# Altium PCB prac_1.PcbDoc
Units mil, origin at the board's own origin, x right, y up, seen from the top; angles counter-clockwise.
Board outline 3900 x 3900 mil, 2 copper layers (Top Layer, Bottom Layer), stack 61.756 mil thick; 83 components, 60 nets, 292 pads, 60 vias.
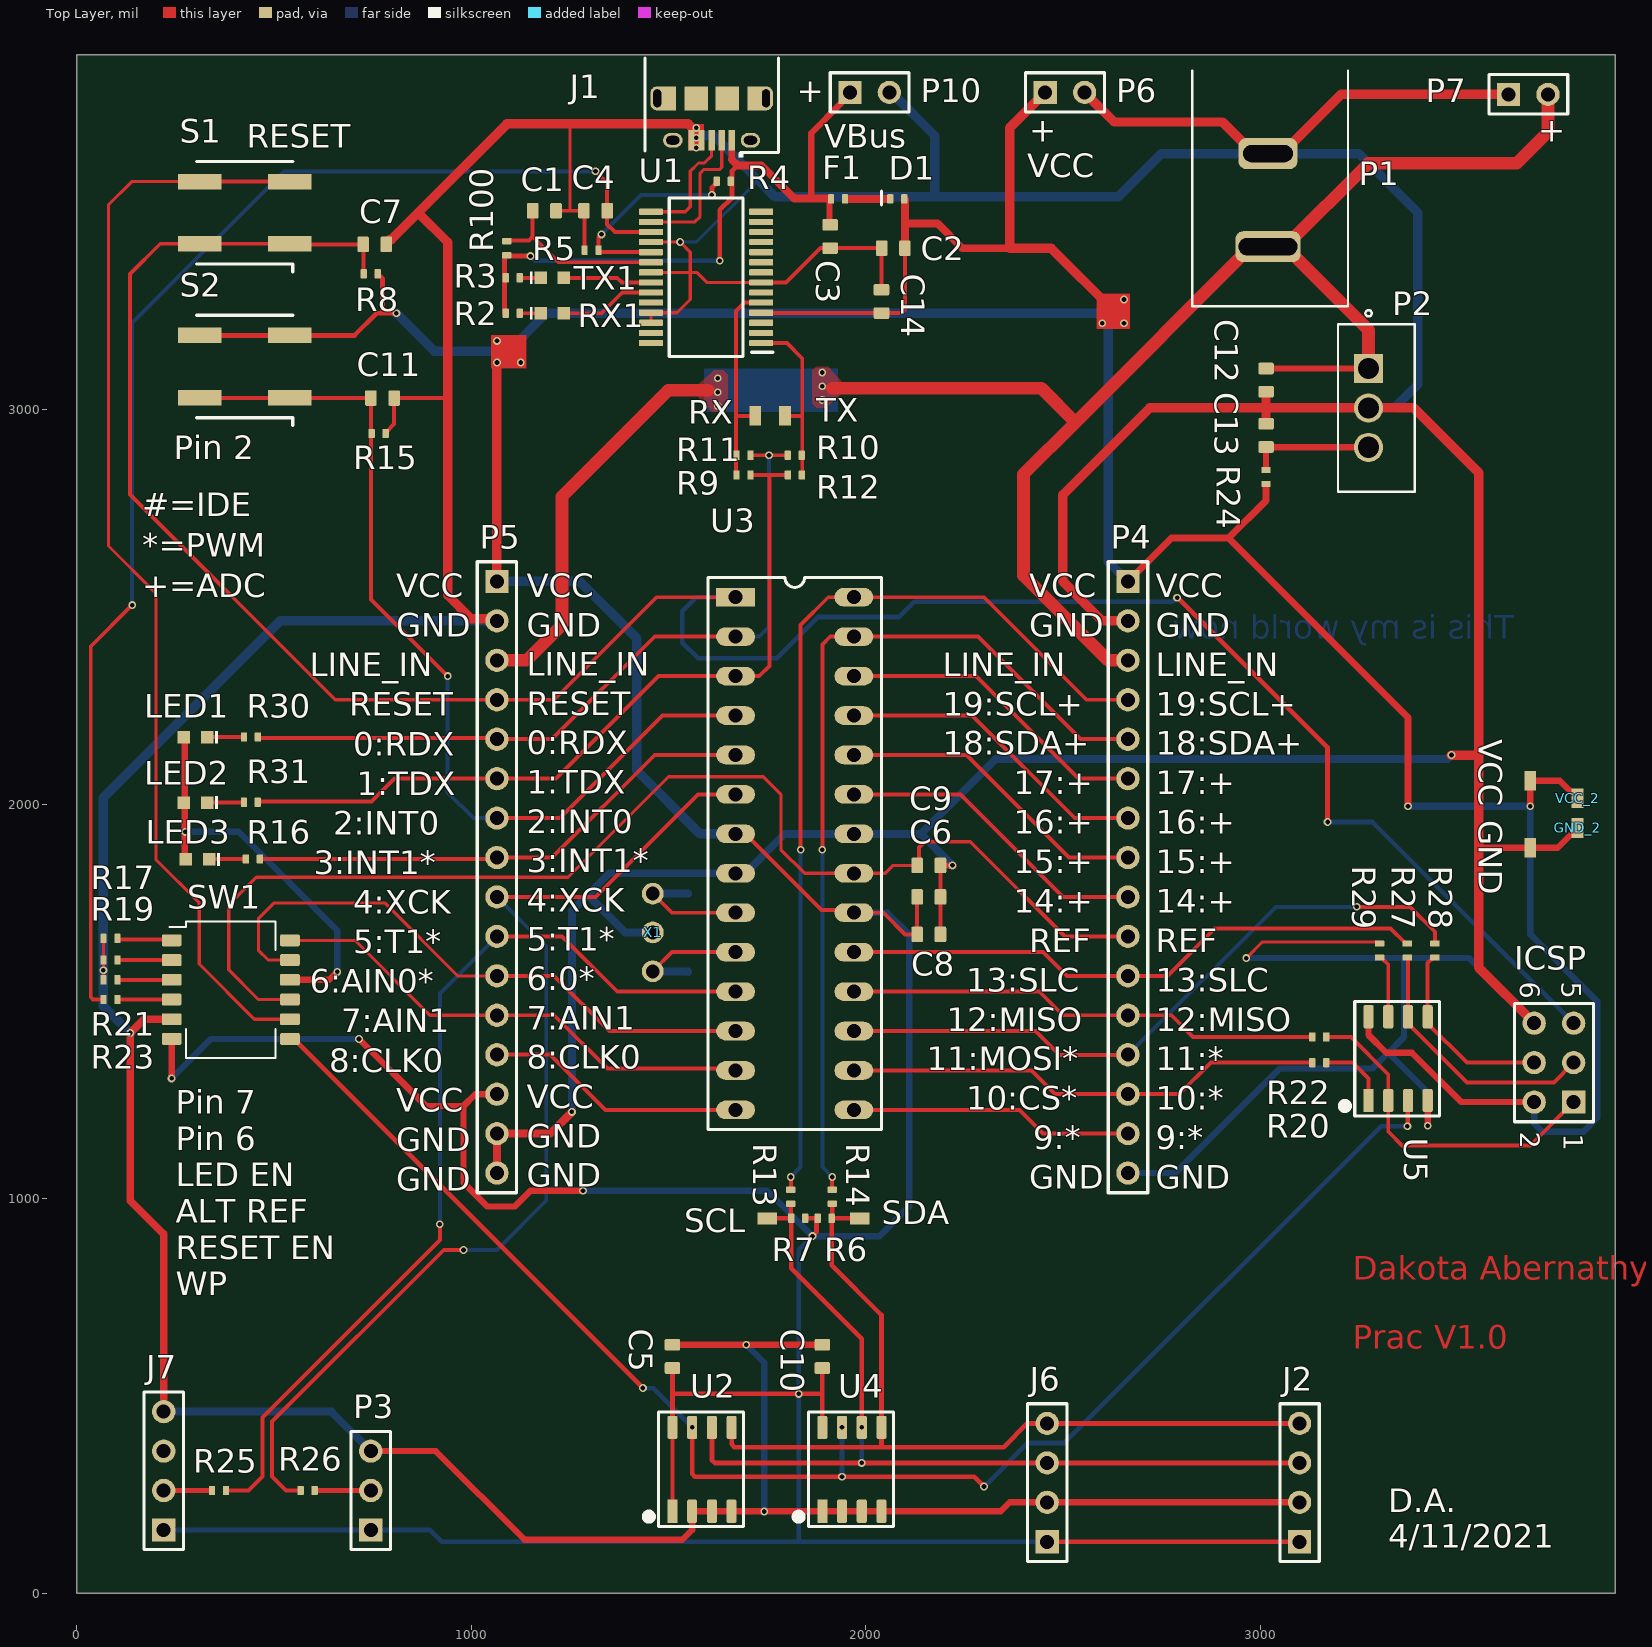
[diagram p0: Top Layer view]
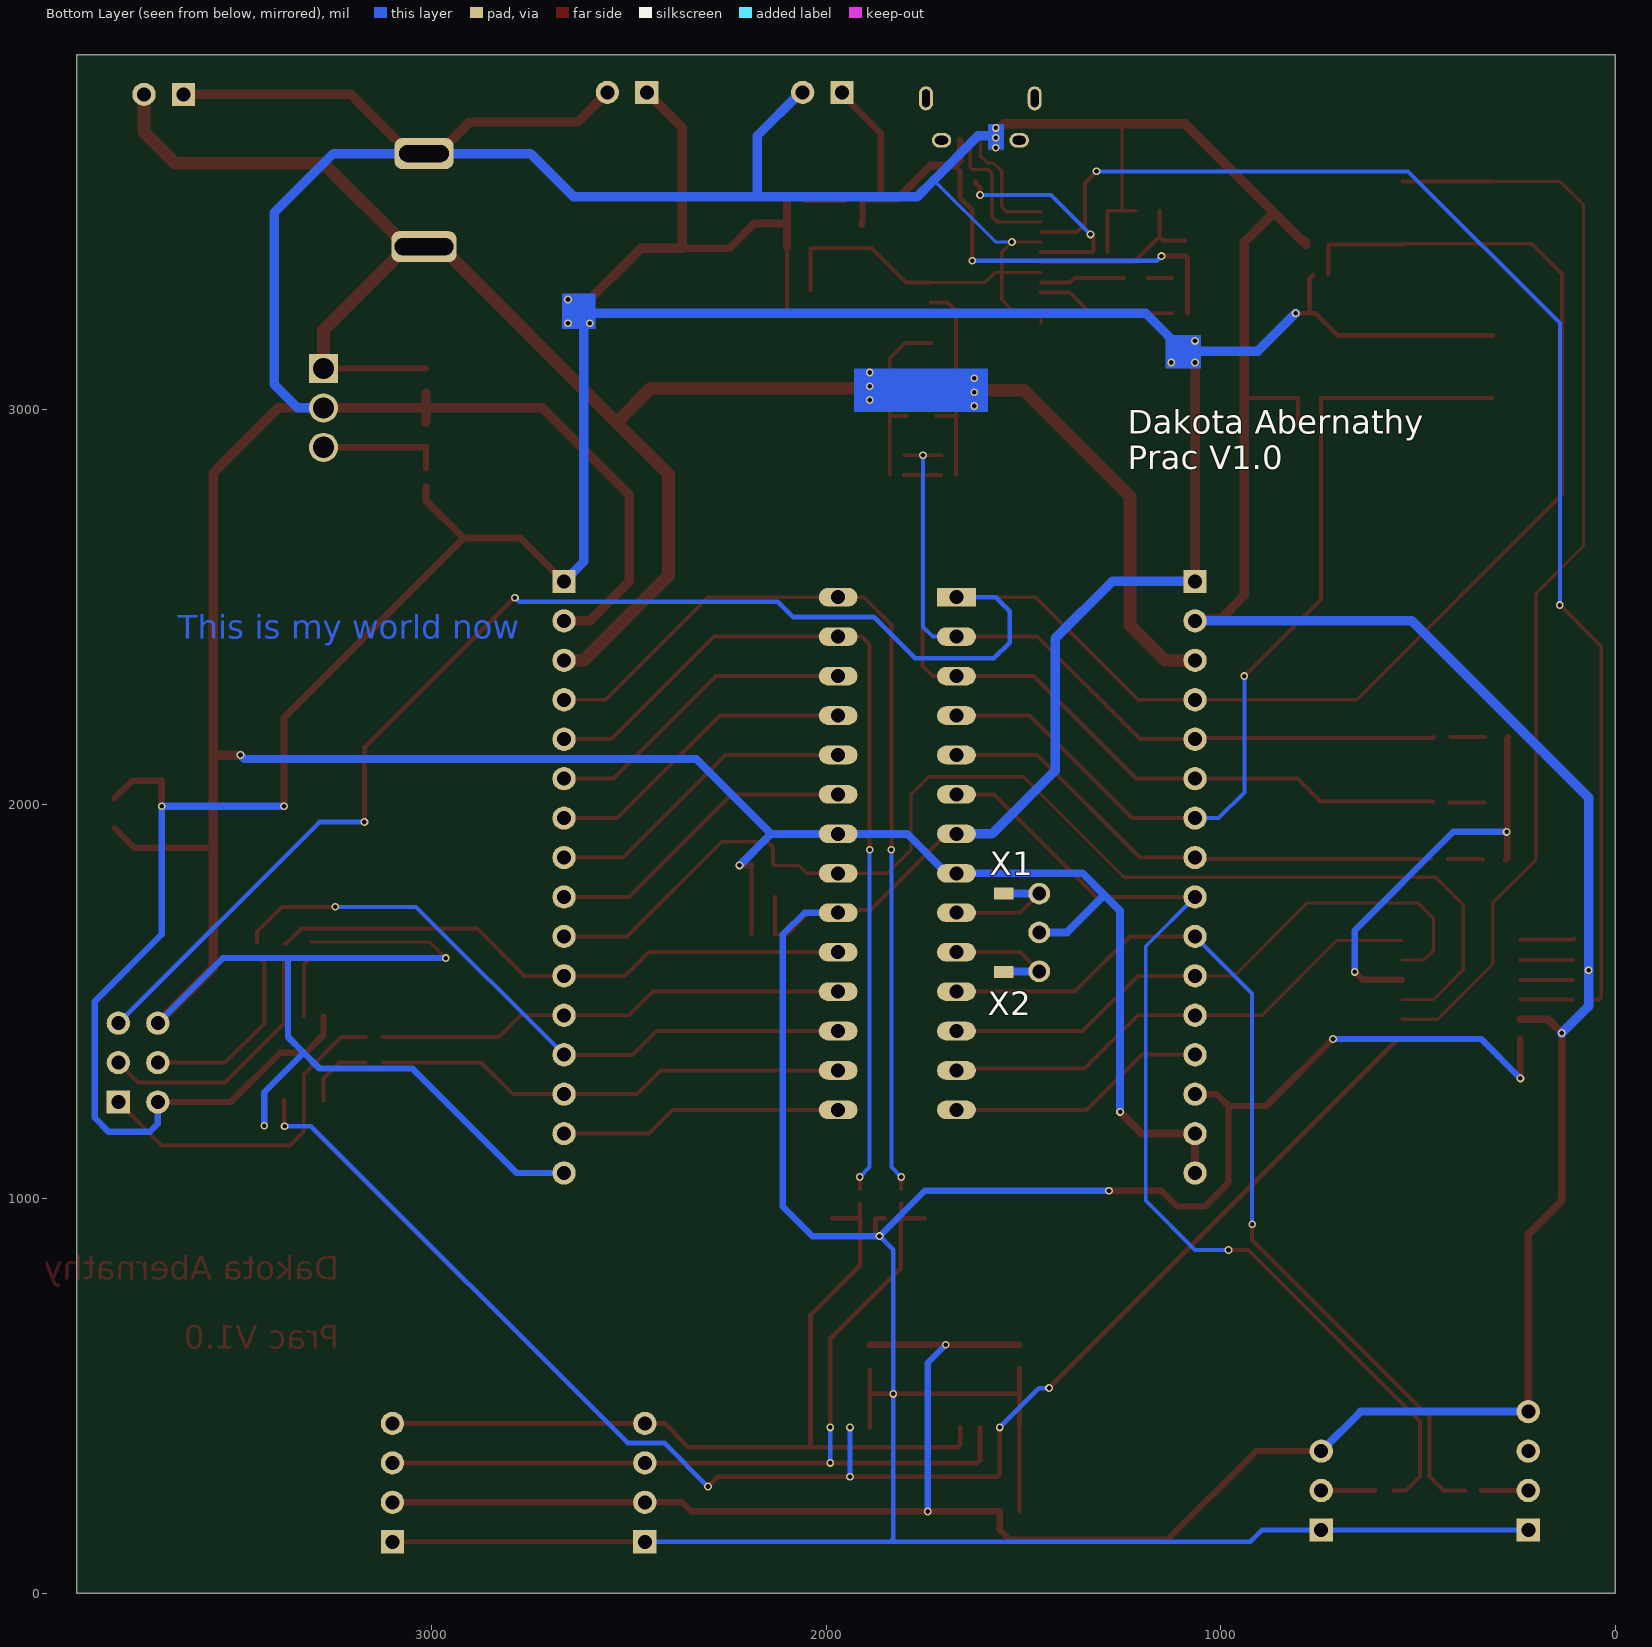
[diagram p1: Bottom Layer view, seen from below]

## Layer stack, top to bottom
Top Solder: solder mask 1, SM-001, Dk 4
Top Layer: signal copper 1.378
Dielectric 1: core 59, Core-043, Dk 4.3
Bottom Layer: signal copper 1.378
Bottom Solder: solder mask 1, SM-001, Dk 4

## Board outline
0,0 0,3900 3900,3900 3900,0

## Design rules (kind name [scope] priority, off if disabled: settings)
AssemblyTestPointUsage [All] p1 off:
AssemblyTestpoint [All] p1 off: testpointundercomponent=TRUE minsize=40 maxsize=100 preferedsize=60 minholesize=0 maxholesize=40 preferedholesize=32 testpointgrid=1 usegrid=TRUE gridtolerance=0.01 allowsidetop=TRUE allowsidebottom=TRUE
Clearance [All] p1: gap=8 ignorepadtopadclearanceinfootprint=TRUE
DiffPairsRouting [All] p1 off: maxlimit=10 minlimit=10 mostfreqgap=10 toplayer_minwidth=15 toplayer_maxwidth=15 toplayer_prefwidth=15 bottomlayer_minwidth=15 bottomlayer_maxwidth=15 bottomlayer_prefwidth=15 maxuncoupledlength=500
FabricationTestPointUsage [All] p1 off: valid=0 allowmultiple=FALSE
FabricationTestpoint [All] p1 off: side=3 testpointundercomponent=TRUE minsize=40 maxsize=100 preferedsize=60 minholesize=0 maxholesize=40 preferedholesize=32 testpointgrid=1 allowsidetop=TRUE allowsidebottom=TRUE usegrid=TRUE gridtolerance=0.01
FanoutControl Fanout_BGA [IsBGA] p1 off: bgadir=Out bgaviamode=Centered fanoutstyle=Auto fanoutdirection=Alternating viagrid=1 // Fanout_BGA (Default Rule)
FanoutControl Fanout_LCC [IsLCC] p2 off: bgadir=Out bgaviamode=Centered fanoutstyle=Auto fanoutdirection=Alternating viagrid=1 // Fanout_LCC (Default Rule)
FanoutControl Fanout_SOIC [IsSOIC] p3 off: bgadir=Out bgaviamode=Centered fanoutstyle=Auto fanoutdirection=Alternating viagrid=1 // Fanout_SOIC (Default Rule)
FanoutControl Fanout_Small [(CompPinCount < 5)] p4 off: bgadir=Out bgaviamode=Centered fanoutstyle=Auto fanoutdirection=OutThenIn viagrid=1 // Fanout_Small (Default Rule)
FanoutControl Fanout_Default [All] p5 off: bgadir=Out bgaviamode=Centered fanoutstyle=Auto fanoutdirection=Alternating viagrid=1 // Fanout_Default (Default Rule)
Height [All] p1 off: minheight=0 maxheight=1000 prefheight=500
HoleSize [All] p1 off: absolutevalues=TRUE maxlimit=100 minlimit=1 maxpercent=80.000 minpercent=20.000
LayerPairs [All] p1 off: enforce=TRUE
MinimumSolderMaskSliver [All] p1 off: minsoldermaskwidth=10
NetAntennae [All] p1 off: netantennaetolerance=0
PasteMaskExpansion [All] p1 off: expansion=0
PlaneClearance [All] p1 off: clearance=20
PlaneConnect [All] p1 off: planeconnectstyle=Relief reliefexpansion=20 reliefentries=4 reliefconductorwidth=10 reliefairgap=10
PolygonConnect [All] p1 off: connectstyle=Relief reliefconductorwidth=10 reliefentries=4 polygonreliefangle="90 Angle" airgapwidth=10
RoomDefinition Prac_1 [InComponentClass('Prac_1')] p1 off: confinementstyle=ConfineIn formatcopy=TRUE lockcomponents=FALSE outline -4,-3290.49 1996,-3290.49 1996,-2290.49 -4,-2290.49
RoutingCorners [All] p1 off: cornerstyle=45-Degree minsetback=100 maxsetback=100
RoutingLayers [All] p1 off: top layer_v5=TRUE bottom layer_v5=TRUE
RoutingPriority [All] p1 off: routingpriority=0
RoutingTopology [All] p1 off: topology=Shortest
RoutingVias [All] p1 off: holewidth=28 width=50 viastyle="Through Hole" minholewidth=28 minwidth=50 maxholewidth=28 maxwidth=50
SilkToSilkClearance [All] p1: silktosilkclearance=8
SilkToSolderMaskClearance [IsPad] p1: minsilkscreentomaskgap=8 clearancetoexposedcopper=TRUE
SolderMaskExpansion [All] p1: expansion=4 istentingtop=FALSE
Width [All] p1 off: maxlimit=10 minlimit=10 preferedwidth=10
6 further rules are at their usual default settings.

## Components (designator, comment, footprint, x,y, rotation, side; value= is the part's Value field where it differs from the comment)
C1 "10µF" C0603(0.8) 1185,3505 r180 top
C2 "10µF" C0603(0.8) 2069.84,3410 r0 top
C3 "0.1µF" C0603(0.8) 1909.84,3439.61 r90 top
C4 "0.1µF" C0603(0.8) 1315,3505 r0 top
C5 "0.1µF" C0603(0.8) 1510,600 r90 top
C6 "10µF" C0603(0.8) 2160,1765 r180 top
C7 "0.1µF" C0603(0.8) 755.16,3419.68 r180 top
C8 "0.1µF" C0603(0.8) 2160,1670 r0 top
C9 "0.1µF" C0603(0.8) 2160,1845 r0 top
C10 "0.1µF" C0603(0.8) 1890,600 r90 top
C11 "0.1µF" C0603(0.8) 774.84,3030 r180 top
C12 "10µF" C0603(0.8) 3015,3075.47 r90 top
C13 "10µF" C0603(0.8) 3015,2935.47 r270 top
C14 "0.1µF" C0603(0.8) 2040,3275 r270 top
D1 "Diode" R0402(0.4)#1 2080,3535 r0 top
F1 "0456040.DR" R0402(0.4)#2 1930,3535 r0 top value=Value
GND "Test_Pad" TP-30X50 3685,1890 r180 top
GND_2 "Test_Pad" TP-30X50 3805,1940 r180 top
ICSP "Header 3X2" HDR2X3 3795,1245 r90 top
J1 "10118194-0001LF" 10118194-0001LF[1] 1609.37,3683.7 r180 top
J2 "Header 4" HDR1X4 3100,130 r90 top
J6 "Header 4" HDR1X4 2460,130 r90 top
J7 "Header 4" HDR1X4 220,160 r90 top
LED1 "SML-LX0603GW-TR" SML-LX0603GW-TR 300.47,2170 r180 top
LED2 "SML-LX0603GW-TR" SML-LX0603GW-TR 300.47,2004.19 r180 top
LED3 "SML-LX0603GW-TR" SML-LX0603GW-TR 305.47,1860.5 r180 top
P1 "Header 2" jack 2842.83,3953.15 r270 top
P2 "Header 3" TO-220-3 3315,2905 r270 top
P3 "Header 3" HDR1X3 745,160 r90 top
P4 "Header 16" HDR1X16 2665,2565 r270 top
P5 "Header 16" HDR1X16 1065,2565 r270 top
P6 "Header 2" HDR1X2 2455,3805 r0 top
P7 "Header 2" HDR1X2 3630,3800 r0 top
P10 "Header 2" HDR1X2 1960,3805 r0 top
R2 "2.2K" R0402(0.4)#2 1105,3245 r180 top
R3 "2.2K" R0402(0.4)#2 1105,3335 r180 top
R4 "4.75K" R0402(0.4)#2 1640,3580 r180 top
R5 "10K" R0402(0.4)#2 1305,3405 r0 top
R6 "10K" R0402(0.4)#2 1896,950 r180 top value=1K
R7 "10K" R0402(0.4)#2 1829,950 r0 top value=1K
R8 "10K" R0402(0.4)#2 745,3345 r0 top
R9 "1K" R0402(0.4)#2 1690.16,2835 r0 top
R10 "1K" R0402(0.4)#2 1820.16,2885 r180 top
R11 "1K" R0402(0.4)#2 1690.16,2885 r0 top
R12 "1K" R0402(0.4)#2 1820.16,2835 r180 top
R13 "0" R0402(0.4)#2 1810,1005 r270 top value=1K
R14 "0" R0402(0.4)#2 1915,1005 r270 top value=1K
R15 "10K" R0402(0.4)#2 765,2940 r180 top
R16 "1K" R0402(0.4)#2 445.91,1861.31 r180 top
R17 "0" R0402(0.4)#2 85,1660 r0 top value=1K
R19 "0" R0402(0.4)#2 85,1605 r0 top value=1K
R20 "0" R0402(0.4)#2 3150,1345 r0 top value=1K
R21 "0" R0402(0.4)#2 85,1555 r0 top value=1K
R22 "0" R0402(0.4)#2 3150,1410 r0 top value=1K
R23 "5K" R0402(0.4)#2 85,1505 r0 top value=1K
R24 "0" R0402(0.4)#2 3015,2830 r270 top value=1K
R25 "0" R0402(0.4)#2 360,260 r0 top value=1K
R26 "0" R0402(0.4)#2 585,260 r180 top value=1K
R27 "0" R0402(0.4)#2 3373.19,1629.09 r90 top value=1K
R28 "0" R0402(0.4)#2 3443.19,1629.09 r90 top value=1K
R29 "1k" R0402(0.4)#2 3303.19,1629.09 r270 top value=1K
R30 "1K" R0402(0.4)#2 440.91,2170.81 r180 top
R31 "1K" R0402(0.4)#2 440.91,2005 r180 top
R100 "0" R0402(0.4)#2 1090,3410 r90 top value=1K
RX "Test_Pad" TP-30X50 1720,2985 r180 top
RX1 "SML-LX0603SIW-TR" SML-LX0603SIW-TR 1205,3245 r0 top
S1 "KSC941J LFS" KSC9(6.5,6.5,7.9)[1] 425,3500 r180 top
S2 "KSC941J LFS" KSC9(6.5,6.5,7.9)[1] 425,3110 r180 top
SCL "Test_Pad" TP-30X50 1750,950 r90 top
SDA "Test_Pad" TP-30X50 1985,950 r90 top
SW1 "218-6LPST" 218-6LPST 390,1530 r270 top
TX "Test_Pad" TP-30X50 1795,2985 r180 top
TX1 "SML-LX0603GW-TR" SML-LX0603GW-TR 1205,3335 r0 top
U1 "768-1007-6-ND" 28-SSOP 1595.24,3336.02 r180 top
U2 "MB85RC256V" MB85RC256V 1585,313.7 r90 top
U3 "ATMEGA328P-PU" dip28 1820,1875 r0 top
U4 "MB85RC256V" MB85RC256V 1965,313.7 r90 top
U5 "CAT25512" MB85RC256V 3350,1355 r90 top value=MB85RC256V
VCC "Test_Pad" TP-30X50 3685,2060 r180 top
VCC_2 "Test_Pad" TP-30X50 3805,2015 r180 top
X1 "Test_Pad" TP-30X50 1550,1774.03 r270 bottom
X1 "16MHz" ZTT16.00MX 1460,1675 r270 top
X2 "Test_Pad" TP-30X50 1550,1575 r270 bottom

## Footprints (in the part's own frame and the unit in brackets; to place one, negate y for a bottom-side part, rotate by r counter-clockwise, add the part's x,y. Pads: shape width x height; smd on the part's side, far side on the other; paste and mask are expansions set on the pad)
28-SSOP [mm] "SOP, 28-Leads, Body 10.20x5.30mm, Pitch 0.65mm, IPC Medium Density"
  rrect25% 1.55x0.4 smd: 1(-3.55,4.225) 2(-3.55,3.575) 3(-3.55,2.925) 4(-3.55,2.275) 5(-3.55,1.625) 6(-3.55,0.975) 7(-3.55,0.325) 8(-3.55,-0.325) 9(-3.55,-0.975) 10(-3.55,-1.625) 11(-3.55,-2.275) 12(-3.55,-2.925) 13(-3.55,-3.575) 14(-3.55,-4.225) 15(3.55,-4.225) 16(3.55,-3.575) 17(3.55,-2.925) 18(3.55,-2.275) 19(3.55,-1.625) 20(3.55,-0.975) 21(3.55,-0.325) 22(3.55,0.325) 23(3.55,0.975) 24(3.55,1.625) 25(3.55,2.275) 26(3.55,2.925) 27(3.55,3.575) 28(3.55,4.225)
  silkscreen extent -4.32,-5.1 2.37,5.1, body extent -2.65,-5.1 2.65,5.1, height 2
218-6LPST [mil]
  rrect25% 30x50 smd: 1(-125,-150) 2(-75,-150) 3(-25,-150) 4(25,-150) 5(75,-150) 6(125,-150) 7(125,150) 8(75,150) 9(25,150) 10(-25,150) 11(-75,150) 12(-125,150)
  silkscreen extent -173,-156 173,114, body extent -173,-166 173,166, height 103
10118194-0001LF[1] [mm]
  rect 0.4x1.35 smd: 1(-1.3,0) 2(-0.65,0) 3(0,0) 4(0.65,0) 5(1.3,0)
  rrect100% 0.9x1.55 hole 0.5 slot 1.15 at 90 deg: M1(-3.5,-2.7) M1(3.5,-2.7)
  rect 1.2x1.55 smd: M1(-2.9,-2.7) M1(2.9,-2.7)
  rrect100% 1.25x0.95 hole 0.55 slot 0.85 at 0 deg: M1(-2.5,0) M1(2.5,0)
  rect 1.5x1.55 smd: M1(-1,-2.7) M1(1,-2.7)
  silkscreen extent -4.3,-5.3 4.3,1.1, body extent -4.02,-5.4 4.02,0.18, height 2.67
C0603(0.8) [mm] "Generic C0603"
  rrect25% 0.75x1 smd: 1(-0.75,0) 2(0.75,0)
  Top Layer pour cut-out: -0.375,0.55 -0.375,-0.55 0.375,-0.55 0.375,0.55
  body extent -0.87,-0.47 0.87,0.47, height 0.8
dip28 [mm]
  rect 2.5x1.2 hole 0.9: 1(-3.81,16.51)
  oval 2.5x1.2 hole 0.9: 2(-3.81,13.97) 3(-3.81,11.43) 4(-3.81,8.89) 5(-3.81,6.35) 6(-3.81,3.81) 7(-3.81,1.27) 8(-3.81,-1.27) 9(-3.81,-3.81) 10(-3.81,-6.35) 11(-3.81,-8.89) 12(-3.81,-11.43) 13(-3.81,-13.97) 14(-3.81,-16.51) 15(3.81,-16.51) 16(3.81,-13.97) 17(3.81,-11.43) 18(3.81,-8.89) 19(3.81,-6.35) 20(3.81,-3.81) 21(3.81,-1.27) 22(3.81,1.27) 23(3.81,3.81) 24(3.81,6.35) 25(3.81,8.89) 26(3.81,11.43) 27(3.81,13.97) 28(3.81,16.51)
  silkscreen extent -5.59,-17.78 5.59,17.78, body extent -5.34,-17.53 5.33,17.53, height 4.06
HDR1X2 [mm] "Connector; Header; 2 Position"
  rect 1.5x1.5 hole 0.9: 1(0,0)
  round 1.5 hole 0.9: 2(2.54,0)
  silkscreen extent -1.27,-1.27 3.81,1.27
HDR1X3 [mm] "Connector; Header; 3 Position"
  rect 1.5x1.5 hole 0.9: 1(0,0)
  round 1.5 hole 0.9: 2(2.54,0) 3(5.08,0)
  silkscreen extent -1.27,-1.27 6.35,1.27
HDR1X4 [mm] "Connector; Header; 4 Position"
  rect 1.5x1.5 hole 0.9: 1(0,0)
  round 1.5 hole 0.9: 2(2.54,0) 3(5.08,0) 4(7.62,0)
  silkscreen extent -1.27,-1.27 8.89,1.27
HDR1X16 [mm] "Connector; Header; 16 Position"
  rect 1.5x1.5 hole 0.9: 1(0,0)
  round 1.5 hole 0.9: 2(2.54,0) 3(5.08,0) 4(7.62,0) 5(10.16,0) 6(12.7,0) 7(15.24,0) 8(17.78,0) 9(20.32,0) 10(22.86,0) 11(25.4,0) 12(27.94,0) 13(30.48,0) 14(33.02,0) 15(35.56,0) 16(38.1,0)
  silkscreen extent -1.27,-1.27 39.37,1.27
HDR2X3 [mm] "Connector; Header; 3x2 Position"
  rect 1.5x1.5 hole 0.9: 1(0,0)
  round 1.5 hole 0.9: 2(0,2.54) 3(2.54,0) 4(2.54,2.54) 5(5.08,0) 6(5.08,2.54)
  silkscreen extent -1.27,-1.27 6.35,3.81
jack [mm]
  rrect50% 2x4.2 hole 3.8 slot 1.1 at 0 deg: 1(13.7,4.5)
  rrect50% 2x3.8 hole 3.2 slot 1.1 at 0 deg: 2(7.7,4.5)
  silkscreen extent 2.35,-0.38 17.53,9.65
KSC9(6.5,6.5,7.9)[1] [mm] "C&K KSC9 tactile switch (button compatible)"
  rect 2.8x1 smd: 1(-2.9,2) 2(2.9,2) 3(-2.9,-2) 4(2.9,-2)
  silkscreen extent -3.1,-3.3 3.1,3.8, body extent -3.4,-3.15 3.4,3.15, height 7.7
MB85RC256V [mm] "TSOP, 8-Leads, Body 4.90x3.90mm, Pitch 1.27mm, IPC Medium Density"
  rect 1.5x0.65 smd: 1(-2.7,1.905)
  rrect35% 1.5x0.65 smd: 2(-2.7,0.635) 3(-2.7,-0.635) 4(-2.7,-1.905) 5(2.7,-1.905) 6(2.7,-0.635) 7(2.7,0.635) 8(2.7,1.905)
  silkscreen extent -3.68,-2.67 3.68,3.63, body extent -1.95,-2.45 1.95,2.45, height 1.6
R0402(0.4)#1 [mm] "Generic R0402"
  rrect25% 0.4x0.6 smd: 1(-0.45,0) 2(0.45,0)
  body extent -0.52,-0.27 0.52,0.26, height 0.4
R0402(0.4)#2 [mm] "Generic R0402"
  rrect25% 0.4x0.6 smd: 1(-0.45,0) 2(0.45,0)
  Top Layer pour cut-out: -0.25,0.381 0.25,0.381 0.25,-0.381 -0.25,-0.381
  body extent -0.52,-0.27 0.52,0.26, height 0.4
SML-LX0603GW-TR [mm] "Lumex LED Green 0603"
  rect 0.8x0.8 smd: 1(-0.75,0) 2(0.75,0)
  silkscreen extent -1.43,-0.4 -1.28,0.4, body extent -0.85,-0.45 0.85,0.45, height 0.6
SML-LX0603SIW-TR [mm] "Lumex LED Green 0603"
  rect 0.8x0.8 smd: 1(-0.75,0) 2(0.75,0)
  silkscreen extent -1.42,-0.4 -1.27,0.4, body extent -0.85,-0.45 0.85,0.45, height 0.6
TO-220-3 [mil]
  rect 74x74 hole 54: 1(-200,-40)
  round 74 hole 54: 2(-100,-40) 3(0,-40)
  silkscreen extent -348,-118 113,78, body extent -307,-115 107,70, height 770
TP-30X50 [mil]
  rect 30x50 smd paste-50: 1(0,0)
  body extent -15,-25 15,25, height 1
ZTT16.00MX [mm]
  round 1.4 hole 0.9: 1(-2.5,0) 2(0,0) 3(2.5,0)
  body extent -5.08,-2.54 5.08,2.54, height 7.5

## Part data
C1 C2 C6 C12 C13: library part C1608X5R1E106M080AC, "CAP CER 10µF 25V X5R 0603", Case=0603, Manufacturer="TDK Corporation", Operating Temperature="-55°C ~ 85°C", Package / Case="0603 (1608 Metric)", Supplier Part Number 1=445-9015-1-ND, Temperature Coefficient=X5R, Tolerance=±20%, Voltage - Rated=25V, Applications="General Purpose", Capacitance=10µF, Category=Capacitors, ComponentLink1Description="Datasheet - Mfg. site", ComponentLink1URL=https://product.tdk.com/info/en/catalog/datasheets/mlcc_commercial_general_en.pdf, Features="Low ESL", Manufacturer Part Number=C1608X5R1E106M080AC, Mounting Type="Surface Mount, MLCC", Part Status=Active, Series=C, Size / Dimension="0.063\" L x 0.032\" W (1.60mm x 0.80mm)", Sub Category="Ceramic Capacitors", Supplier 1=Digi-Key, Thickness (Max)="0.039\" (1.00mm)"
C3 C4 C5 C7 C8 C9 C10 C11 C14: library part GRM188R71H104KA93D, "CAP CER 0.1µF 50V X7R 0603", Case=0603, Manufacturer="Murata Electronics North America", Operating Temperature="-55°C ~ 125°C", Package / Case="0603 (1608 Metric)", Supplier Part Number 1=490-1519-1-ND, Temperature Coefficient=X7R, Tolerance=±10%, Voltage - Rated=50V, Applications="General Purpose", Capacitance=0.1µF, Category=Capacitors, ComponentLink1Description="Datasheet - Mfg. site", ComponentLink1URL=http://www.murata.com/~/media/webrenewal/support/library/catalog/products/capacitor/mlcc/c02e.ashx?la=en-us, Manufacturer Part Number=GRM188R71H104KA93D, Mounting Type="Surface Mount, MLCC", Part Status=Active, Series=GRM, Size / Dimension="0.063\" L x 0.032\" W (1.60mm x 0.80mm)", Sub Category="Ceramic Capacitors", Supplier 1=Digi-Key, Thickness (Max)="0.035\" (0.90mm)"
D1: "Default Diode", Code_JEDEC=DO-214-AB, LatestRevisionDate=17-Jul-2002, LatestRevisionNote="Re-released for DXP Platform.", PackageDescription="DO-214-AB/SMC; 2 C-Bend Leads; Body 7.9 x 5.9 mm, inc. leads (LxW)", PackageReference=SMC, PackageVersion=Sep-1996, Published=8-Jun-2000, Publisher="Altium Limited"
F1: "Imported", Built_By=EMA_UL_Team, C="Copyright (C) 2015 Accelerated Designs. All rights reserved", Manufacturer_Part_Number=0456040.DR, RefDes=RefDes, Type=DEV, Vendor="Littelfuse Inc"
GND GND_2 RX SCL SDA TX VCC VCC_2 X1 X2: library part TP30x50, "TP 30X50", Categories=Miscellaneous, Detailed Description="Test Pad 30x50", Manufacturer Part Number=TP30x50, Sub Category="Test Pads"
ICSP: "Header, 3-Pin, Dual row", LatestRevisionDate=17-Jul-2002, LatestRevisionNote="Re-released for DXP Platform.", Publisher="Altium Limited"
J1: "CONN RCPT USB2.0 MICRO B SMD R/A", Current Rating="1.8A per Contact", Insulation Color=Black, Manufacturer="Amphenol FCI", Material Flammability Rating="UL94 V-0", Operating Temperature="-30°C ~ 80°C", Supplier Part Number 1=609-4618-1-ND, Voltage Rating=100VAC, Category="Connectors, Interconnects", ComponentLink1Description="Datasheet - Mfg. site", ComponentLink1URL=http://www.amphenol-icc.com/media/wysiwyg/files/drawing/10118194.pdf, Connector Type="USB - micro B", Contact Finish=Gold, Detailed Description="USB - micro B USB 2.0 Receptacle Connector 5 Position Surface Mount, Right Angle; Through Hole", Features="Solder Retention", Gender=Receptacle, Manufacturer Part Number=10118194-0001LF, Mating Cycles=10000, Mounting Feature=Horizontal, Mounting Type="Surface Mount, Right Angle; Through Hole", Number of Contacts=5, Part Status=Active, Shell/Shielding Material="Steel, Stainless", Shielding=Shielded, Specifications="USB 2.0", Sub Category="USB, DVI, HDMI Connectors", Supplier 1=Digi-Key, Termination=Solder
J2 J6 J7: "Header, 4-Pin", LatestRevisionDate=17-Jul-2002, LatestRevisionNote="Re-released for DXP Platform.", Publisher="Altium Limited"
LED1 LED2 LED3 TX1: "LED GREEN DIFFUSED SMD", Color=Green, Current - Test=20mA, Lens Color=White, Manufacturer="Lumex Opto/Components Inc.", Millicandela Rating=18mcd, Package / Case="0603 (1608 Metric)", Supplier Part Number 1=67-1549-1-ND, Voltage - Forward (Vf) (Typ)=2.2V, Category=Optoelectronics, ComponentLink1Description="Datasheet - Mfg. site", ComponentLink1URL=https://www.lumex.com/content/files/ProductAttachment/SML-LX0603GW-TR.pdf, Configuration=Standard, Detailed Description="Green  LED Indication - Discrete 2.2V 0603 (1608 Metric)", Height (Max)=0.60mm, Lens Size="1.00mm x 0.80mm", Lens Style="Rectangle with Flat Top", Lens Transparency=Diffused, Manufacturer Part Number=SML-LX0603GW-TR, Mounting Type="Surface Mount", Part Status=Active, Size / Dimension="1.60mm L x 0.80mm W", Sub Category="LED Indication - Discrete", Supplier 1=Digi-Key, Viewing Angle=160°
P1 P6 P7 P10: "Header, 2-Pin", LatestRevisionDate=17-Jul-2002, LatestRevisionNote="Re-released for DXP Platform.", Publisher="Altium Limited"
P2 P3: "Header, 3-Pin", LatestRevisionDate=17-Jul-2002, LatestRevisionNote="Re-released for DXP Platform.", Publisher="Altium Limited"
P4 P5: "Header, 16-Pin", LatestRevisionDate=17-Jul-2002, LatestRevisionNote="Re-released for DXP Platform.", Publisher="Altium Limited"
R2 R3: library part ERJ-PA2F2201X, "RES SMD 2.2K OHM 1% 1/5W 0402", Case=0402, Manufacturer="Panasonic Electronic Components", Operating Temperature="-55°C ~ 155°C", Package / Case="0402 (1005 Metric)", Power (Watts)="0.2W, 1/5W", Resistance="2.2 kOhms", Supplier Part Number 1=P17226CT-ND, Temperature Coefficient=±100ppm/°C, Tolerance=±1%, Category=Resistor, ComponentLink1Description="Datasheet - Mfg. site", ComponentLink1URL=https://industrial.panasonic.com/cdbs/www-data/pdf/RDO0000/AOA0000C331.pdf, Composition="Thick Film", Features="Automotive AEC-Q200, Pulse Withstanding", Height - Seated (Max)="0.016\" (0.40mm)", Manufacturer Part Number=ERJ-PA2F2201X, Part Status=Active, Series=ERJ, Size / Dimension="0.039\" L x 0.020\" W (1.00mm x 0.50mm)", Sub Category="Chip Resistor - Surface Mount", Supplier 1=Digi-Key, Supplier Device Package=0402
R4: library part AC0402FR-074K75L, "RES SMD 4.75K OHM 1% 1/16W 0402", Case=0402, Manufacturer=Yageo, Operating Temperature="-55°C ~ 155°C", Package / Case="0402 (1005 Metric)", Power (Watts)="0.063W, 1/16W", Resistance="4.75 kOhms", Supplier Part Number 1=YAG3496CT-ND, Temperature Coefficient=±100ppm/°C, Tolerance=±1%, Category=Resistor, ComponentLink1Description="Datasheet - Mfg. site", ComponentLink1URL=http://www.yageo.com/NewPortal/yageodocoutput?fileName=/pdf/R-Chip/PYu-AC_51_RoHS_L_6.pdf, Composition="Thick Film", Features="Automotive AEC-Q200, Moisture Resistant", Height - Seated (Max)="0.015\" (0.37mm)", Manufacturer Part Number=AC0402FR-074K75L, Part Status=Active, Series=AC, Size / Dimension="0.039\" L x 0.020\" W (1.00mm x 0.50mm)", Sub Category="Chip Resistor - Surface Mount", Supplier 1=Digi-Key, Supplier Device Package=0402
R5 R8 R15: library part AC0402FR-0710KL, "RES SMD 10K OHM 1% 1/16W 0402", Case=0402, Manufacturer=Yageo, Operating Temperature="-55°C ~ 155°C", Package / Case="0402 (1005 Metric)", Power (Watts)="0.063W, 1/16W", Resistance="10 kOhms", Supplier Part Number 1=YAG3436CT-ND, Temperature Coefficient=±100ppm/°C, Tolerance=±1%, Category=Resistor, ComponentLink1Description="Datasheet - Mfg. site", ComponentLink1URL=http://www.yageo.com/NewPortal/yageodocoutput?fileName=/pdf/R-Chip/PYu-AC_51_RoHS_L_6.pdf, Composition="Thick Film", Features="Automotive AEC-Q200, Moisture Resistant", Height - Seated (Max)="0.015\" (0.37mm)", Manufacturer Part Number=AC0402FR-0710KL, Part Status=Active, Series=AC, Size / Dimension="0.039\" L x 0.020\" W (1.00mm x 0.50mm)", Sub Category="Chip Resistor - Surface Mount", Supplier 1=Digi-Key, Supplier Device Package=0402
R6 R7 R9 R10 R11 R12 R13 R14 R16 R17 R19 R20 R21 R22 R23 R24 R25 R26 R27 R28 R29 R30 R31 R100: library part AC0402FR-071KL, "RES SMD 1K OHM 1% 1/16W 0402", Case=0402, Manufacturer=Yageo, Operating Temperature="-55°C ~ 155°C", Package / Case="0402 (1005 Metric)", Power (Watts)="0.063W, 1/16W", Resistance="1 kOhms", Supplier Part Number 1=311-1KLBCT-ND, Temperature Coefficient=±100ppm/°C, Tolerance=±1%, Category=Resistor, ComponentLink1Description="Datasheet - Mfg. site", ComponentLink1URL=http://www.yageo.com/NewPortal/yageodocoutput?fileName=/pdf/R-Chip/PYu-AC_51_RoHS_L_6.pdf, Composition="Thick Film", Features="Automotive AEC-Q200, Moisture Resistant", Height - Seated (Max)="0.015\" (0.37mm)", Manufacturer Part Number=AC0402FR-071KL, Part Status=Active, Series=AC, Size / Dimension="0.039\" L x 0.020\" W (1.00mm x 0.50mm)", Sub Category="Chip Resistor - Surface Mount", Supplier 1=Digi-Key, Supplier Device Package=0402
RX1: "LED RED DIFFUSED SMD", Color=Red, Current - Test=20mA, Lens Color=White, Manufacturer="Lumex Opto/Components Inc.", Millicandela Rating=71.5mcd, Package / Case="0603 (1608 Metric)", Supplier Part Number 1=67-1690-1-ND, Voltage - Forward (Vf) (Typ)=2V, Category=Optoelectronics, ComponentLink1Description="Datasheet - Mfg. site", ComponentLink1URL=https://www.lumex.com/content/files/ProductAttachment/SML-LX0603SIW-TR.pdf, Configuration=Standard, Detailed Description="Red  LED Indication - Discrete 2V 0603 (1608 Metric)", Height (Max)=0.60mm, Lens Size="1.00mm x 0.80mm", Lens Style="Rectangle with Flat Top", Lens Transparency=Diffused, Manufacturer Part Number=SML-LX0603SIW-TR, Mounting Type="Surface Mount", Part Status=Active, Size / Dimension="1.60mm L x 0.80mm W", Sub Category="LED Indication - Discrete", Supplier 1=Digi-Key, Viewing Angle=128°
S1 S2: "SWITCH TACTILE SPST-NO 0.05A 32V", Contact Rating @ Voltage="0.05A @ 32VDC", Manufacturer=C&K, Supplier Part Number 1=CKN10433CT-ND, Actuator Height off PCB, Vertical=7.70mm, Actuator Orientation="Top Actuated", Actuator Type="Plunger for Cap", Category=Switches, Circuit=SPST-NO, ComponentLink1Description="Datasheet - Mfg. site", ComponentLink1URL=https://www.ckswitches.com/media/1459/ksc.pdf, Detailed Description="Tactile Switch SPST-NO Top Actuated Surface Mount", Manufacturer Part Number="KSC941J LFS", Mounting Type="Surface Mount / J Lead", Number of Positions=1, Outline="6.20mm x 6.20mm", Part Status=Active, Series=KSC9, Sub Category="Tactile Switches", Supplier 1=Digi-Key, Switch Function=Off-Mom
SW1: "SWITCH SLIDE DIP SPST 25MA 24V", Contact Rating @ Voltage=25mA, Manufacturer="CTS Electrocomponents", Operating Temperature="-55°C ~ 85°C", Supplier Part Number 1=CT2186LPST-ND, Actuator Type="Slide (Standard)", Category=Switches, Circuit=SPST, ComponentLink1Description="Datasheet - Mfg. site", ComponentLink1URL=https://www.ctscorp.com/wp-content/uploads/218.pdf, Detailed Description="Dip Switch SPST 6 Position Surface Mount Slide (Standard) Actuator 25mA 24VDC", Manufacturer Part Number=218-6LPST, Mounting Type="Surface Mount", Number of Positions=6, Outline="8.64mm x 8.79mm", Part Status=Active, Series=218, Sub Category="DIP Switches", Supplier 1=Digi-Key
U1: library part FT232RL, "IC USB FS SERIAL UART 28-SSOP", Manufacturer=FTDI, Operating Temperature="-40°C ~ 85°C", Package / Case=28-SSOP, Supply Voltage="3.3V ~ 5.25V", Category="Integrated Circuits (ICs)", ComponentLink1Description="Datasheet - Mfg. site", ComponentLink1URL=https://www.ftdichip.com/Support/Documents/DataSheets/ICs/DS_FT232R.pdf, Detailed Description="USB Bridge, USB to UART USB 2.0 UART Interface 28-SSOP", Manufacturer Part Number=FT232RL, Part Status=Active, Series=USBmadeEZ-UART, Sub Category="UART-USB IC", Supplier 1=Digi-Key, Supplier Device Package=28-SSOP, Supplier Part Number 1=768-1007-6-ND
U2 U4: "IC FRAM 256KBIT I2C 1MHZ 8SOP", Manufacturer="FUJITSU SEMICONDUCTOR", Operating Temperature="-40°C ~ 85°C", Package / Case=SOP-8, Supplier Device Package=FPT-8P-M02/8, Supplier Part Number 1=865-1249-1-ND, Supply Voltage="2.7 V to 5.5 V", Category="Integrated Circuits (ICs)", ComponentLink1Description="Datasheet - Mfg. site", ComponentLink1URL=https://www.fujitsu.com/us/Images/MB85RC256V-DS501-00017-3v0-E.pdf, Detailed Description="IC FRAM 256KBIT I2C 1MHZ 8SOP", Height - Seated (Max)=1.6mm, ID=653, Manufacturer Part Number=MB85RC256V, Part Status=Active, Primary Attributes=I2C, Series=MB85RC, Size / Dimension=6mmx5mm, Sub Category="Memory FRAM", Supplier 1=Digi-Key
U5: library part MB85RC256V, "IC FRAM 256KBIT I2C 1MHZ 8SOP", Manufacturer="FUJITSU SEMICONDUCTOR", Operating Temperature="-40°C ~ 85°C", Package / Case=SOP-8, Supplier Device Package=FPT-8P-M02/8, Supplier Part Number 1=865-1249-1-ND, Supply Voltage="2.7 V to 5.5 V", Category="Integrated Circuits (ICs)", ComponentLink1Description="Datasheet - Mfg. site", ComponentLink1URL=https://www.fujitsu.com/us/Images/MB85RC256V-DS501-00017-3v0-E.pdf, Detailed Description="IC FRAM 256KBIT I2C 1MHZ 8SOP", Height - Seated (Max)=1.6mm, ID=653, Manufacturer Part Number=MB85RC256V, Part Status=Active, Primary Attributes=I2C, Series=MB85RC, Size / Dimension=6mmx5mm, Sub Category="Memory FRAM", Supplier 1=Digi-Key
X1: library part ZTT16.00MX, "16 MHz Ceramic Resonator / Oscillator", Frequency Stability=0.30%, Frequency Tolerance=0.50%, Load Capacitance="30 pF", Manufacturer=ECS, Operating Temperature="-20~ +80°C", Supplier Part Number 1=520-ZTT1600MX, Category="Crystals, Oscillators, Resonators", ComponentLink1Description="Datasheet - Mfg. site", ComponentLink1URL=https://www.mouser.com/datasheet/2/122/zttr-19738.pdf, Detailed Description="16 MHz Ceramic Resonator / Oscillator", Frequency=16MHz, Height - Seated (Max)=7.5mm, Manufacturer Part Number=ZTT16.00MX, Mounting Type="Through Hole", Part Status=Active, Series=ZZT, Sub Category="Resonator / Oscillator", Supplier 1=Mouser, Type="MHz Oscillator"

## Via types
v1: diameter 19.68, hole 11.81, Top Layer to Bottom Layer, tented both sides, 60 vias

## Nets (pads, with @x,y where several pads share a name; then routed paths per layer and width w, separated by ;. In a path a pad name is that pad's centre, name@x,y a point inside that pad or via, vN(x,y) a via of type N, cw(c..) or ccw(c..) an arc to the next point about the centre after c; other vN are vias at no path point)
3V3: C4.2 R23.1 U1.17 | length 3386.2
  Top Layer w10: R23.1@66,1505 40.86,1505 35,1510.86 35,2400 v1(140,2505) ; v1(1315,3605) 1344.53,3575.47 C4.2 1344.53,3470.47 1363.82,3451.18 U1.17
  Bottom Layer w10: v1(140,2505) 140,3220 525,3605 v1(1315,3605)
ALT_REF: C9.1 P4.10 SW1.9 U3.21 | length 3116.4
  Top Layer w8: SW1.9 460,1505 385,1580 385,1745 455,1815 1245,1815 1500,2070 1740,2070 1785,2025 1785,1885 1845,1825 U3.21 2050,1825 2070,1845 C9.1
  Top Layer w10: C9.1 2135,1849.53 2135,1890 2150,1905 2265,1905 2505,1665 P4.10@2676.01,1665
CS: R20.2 U5.1 | length 180.2
  Top Layer w10: R20.2 3235,1345 3275,1305 U5.1
GND: C1.1 C2.1 C3.1 C4.1 C5.2 C6.1 C7.1 C8.2 C9.2 C10.2 C11.1 C12.1 C13.1 C14.1 GND.1 GND_2.1 ICSP.6 J1.4 J1.5 J2.2 J6.2 J7.4 P1.2 P2.2 P3.3 P4.2 P4.16 P5.2 P5.15 P5.16 P6.2 P7.1 P10.2 R5.1 R15.1 R17.1 R19.1 R21.1 R29.1 SW1.5 U1.7 U1.18 U1.21 U1.25 U1.26 U2.2 U2.3 U2.4 U3.8 U3.22 U4.1 U4.2 U4.3 U4.4 U5.4 X1.2 | length 24855.3
  Top Layer w8: R21.1 R19.1 R17.1 ; C1.1 1250,3505 ; 1250,3725 1250,3505 ; C4.1 1250,3505 ; U1.26 U1.25 1521.46,3246.46 1555,3280 1555,3348.82 ; U1.21 1555,3348.82 ; U1.18 v1(1529.41,3425.59) 1555,3400 1555,3348.82 ; U1.7 1596.77,3323.23 1571.18,3348.82 1555,3348.82 ; v1(2965,1610) 3006.16,1651.16 3246.16,1651.16 R29.1@3306.79,1651.16
  Top Layer w10: R15.1@784.47,2944.47 804.37,2964.37 C11.1 940,3030 ; C4.1 1286.38,3504.09 1286.38,3400.91 R5.1@1287.28,3400 ; U1.7 1798.23,3323.23 1885,3410 C2.1 2040.31,3304.84 C14.1 ; C8.2 C6.1 C9.2
  Top Layer w12: J1.5 J1.4
  Top Layer w16: P3.3 910,360 1135,135 1535,135 1560,160 U2.2 U2.3 U2.4 U4.1 U4.2 U4.3 U4.4 2342.4,207.4 2365,230 J6.2 J2.2 ; C5.2 C10.2 ; C9.2 v1(2220,1845) ; v1(3425,1185) U5.4 ; 3554.78,2124.78 3555,2125 ; 3555,1890 GND.1 3755,1890 GND_2.1
  Top Layer w20: J7.4 220,910 135,995 v1(135,1420) 170,1455 SW1.5 ; P5.16 P5.15 1200,1165 v1(1255,1220)
  Top Layer w24: C7.1 784.69,3424.61 791.45,3431.37 796.37,3431.37 865,3500 ; P5.2 1059.47,2470.53 999.47,2470.53 940,2530 940,3030 940,3425 865,3500 ; 1560,3715 1550,3725 1250,3725 1090,3725 865,3500 ; P6.2 2630,3730 2904.57,3730 2984.57,3650 P1.2 3055.43,3650 3205.43,3800 P7.1 ; P4.2 2664.47,2465.53 2599.47,2465.53 2500,2565 2500,2785 2720.47,3005.47 3015,3005.47 ; C13.1@3015,2969.14 3015,3005.47 ; C12.1@3015,3041.66 3015,3005.47 ; v1(3485.17,2124.78) 3554.78,2124.78 ; ICSP.6 3555,1585 3555,1890 3555,2125 3555,2840 3390,3005 P2.2 3215,3005 3214.53,3005.47 3015,3005.47
  Bottom Layer w8: v1(1529.41,3425.59) 1570.59,3425.59 1727.5,3582.5
  Bottom Layer w16: v1(1697.09,629.45) 1742.9,583.64 v1(1742.9,206.67) ; P4.16 2785,1065 3050,1330 3285,1330 3325,1370 ; v1(2965,1610) 3365,1610 ; v1(3425,1185) 3425,1270 3325,1370 ; ICSP.6 3530,1610 3365,1610 ; 3325,1370 3365,1410 3365,1610
  Bottom Layer w20: J7.4 645,460 P3.3 ; v1(1255,1220) 1255,1730 1295,1770 ; X1.2 1390,1675 1295,1770 ; v1(2220,1845) 2140,1925 ; v1(3485.17,2124.78) 3475.22,2114.83 2329.83,2114.83 2140,1925 ; 1295,1770 1350,1825 U3.8 1695,1825 1795,1925 U3.22 2140,1925
  Bottom Layer w24: v1(135,1420) 67.09,1487.91 v1(67.09,1578.98) 67.09,2017.09 515,2465 P5.2 ; v1@1570,3695 1615,3695 1727.5,3582.5 1770,3540 2175,3540 ; P10.2 2065,3805 2175,3695 2175,3540 ; P2.2 3340,3005 3400,3065 3400,3500 3250,3650 P1.2 2750,3650 2640,3540 2175,3540
  other v1: 1570,3665 1570,3690 1570,3715
H\O\L\D\: R29.2 U5.7 | length 159.7
  Top Layer w10: R29.2@3304.38,1610.19 3308.31,1610.19 3325,1593.5 U5.7
LED_GND: LED1.2 LED2.2 LED3.2 SW1.10 | length 1033.4
  Top Layer w16: LED1.2 273.45,2167.5 273.45,2004.19 273.45,1930 273.45,1863 LED3.2 ; SW1.10 640,1555 v1(660,1575)
  Bottom Layer w16: v1(275,1930) 410,1930 660,1680 v1(660,1575)
LINE_IN: C12.2 P1.1 P2.1 P4.3 P5.3 P7.2 | length 4713.5
  Top Layer w16: C12.2 P2.1
  Top Layer w32: P5.3 1140,2365 1230,2455 1230,2780 1500,3050 1600,3050 ; 1915,3055 2445,3055 2531.46,2968.54 ; P4.3 2615,2365 2400,2580 2400,2837.09 2531.46,2968.54 ; P2.1 3275,3202.09 P1.1@3063.31,3413.78 ; P7.2 3730,3705 3650,3625 3274.53,3625 P1.1@3063.31,3413.78 ; 2531.46,2968.54 2976.69,3413.78 P1.1 P1.1@3063.31,3413.78
  other v1: 1625,3010 1890,3025 1625,3045 1890,3060 1625,3080 1890,3095
NetC1_2: C1.2 R100.2 U1.20 | length 461.9
  Top Layer w10: R100.2@1090,3430 1145.94,3430 1155.47,3439.53 ; C1.2 1155.47,3439.53 ; U1.20 1220.59,3374.41 1157.97,3437.03 1155.47,3439.53
NetC13_2: C13.2 P2.3 R24.1 | length 314.4
  Top Layer w16: R24.1@3015,2851.91 C13.2 3015.47,2905.47 3274.53,2905.47 P2.3
NetD1_1: D1.1 F1.2 | length 98.5
  Top Layer w20: 1955.77,3535 2054.24,3535
NetJ1_2: J1.2 U1.16 | length 370.1
  Top Layer w8: U1.16 1566.77,3476.77 1580,3490 1580,3600 1590,3610 1630.27,3610 1634.96,3614.69 J1.2
NetJ1_3: J1.3 U1.15 | length 304.8
  Top Layer w8: U1.15 1542.36,3502.36 1555,3515 1555,3605 1576,3626 1591,3626 1609.37,3644.37 J1.3
NetJ7_2: J7.2 R25.1 | length 120.1
  Top Layer w12: J7.2 R25.1@340.09,260
NetLED1_1: LED1.1 R30.2 | length 87.3
  Top Layer w10: LED1.1 330.81,2170.81 R30.2@416.96,2170.81
NetLED2_1: LED2.1 R31.2 | length 90.4
  Top Layer w10: LED2.1@330.81,2005 R31.2@421.19,2005
NetLED3_1: LED3.1 R16.2 | length 89.5
  Top Layer w10: LED3.1 335.81,1861.31 R16.2@424.21,1861.31
NetP3_2: P3.2 R26.1 | length 137.1
  Top Layer w12: R26.1@607.92,260 P3.2
NetR2_1: R2.1 RX1.1 | length 61.6
  Top Layer w10: R2.1@1123.91,3245 RX1.1@1185.47,3245
NetR3_1: R3.1 TX1.1 | length 62.8
  Top Layer w10: R3.1 TX1.1@1185.47,3335
NetR4_2: R4.2 R5.2 U1.19 | length 536.1
  Top Layer w10: R5.2 1322.72,3437.72 v1(1330,3445) ; R5.2@1323.91,3400 U1.19
  Top Layer w12: v1(1610,3545) 1610,3563.78 1622.28,3576.06 R4.2
  Bottom Layer w10: v1(1330,3445) 1430,3545 v1(1610,3545)
NetR17_2: R17.2 SW1.1 | length 139.4
  Top Layer w10: R17.2 105.22,1657.5 237.5,1657.5 SW1.1
NetR19_2: R19.2 SW1.2 | length 132.8
  Top Layer w10: R19.2@107.22,1605 SW1.2
NetR21_2: R21.2 SW1.3 | length 132.8
  Top Layer w10: R21.2@107.22,1555 SW1.3
NetR23_2: R23.2 SW1.4 | length 132.8
  Top Layer w10: R23.2@107.22,1505 SW1.4
NetRX1_2: RX1.2 U1.23 | length 232.7
  Top Layer w10: RX1.2@1244.53,3245 1330,3245 1382.64,3297.64 U1.23
NetTX1_2: TX1.2 U1.22 | length 215.8
  Top Layer w10: TX1.2@1244.53,3335 1370,3335 1381.77,3323.23 U1.22
PB0: P5.13 U3.14 | length 663
  Top Layer w10: P5.13 1200,1365 1340,1225 U3.14
PB1: P4.15 U3.15 | length 719.9
  Top Layer w10: U3.15 2390,1225 2450,1165 P4.15
PB2: P4.14 R20.1 U3.16 | length 1211.7
  Top Layer w10: U3.16 2420,1325 2480,1265 P4.14 2795,1265 2875,1345 3123.72,1345
PB3: P4.13 R28.2 U3.17 | length 1707.8
  Top Layer w10: U3.17 2430,1425 2490.86,1364.14 2664.14,1364.14 P4.13 ; v1(3245,1740) 3380,1740 3443.19,1676.81 R28.2@3443.19,1649.29
  Bottom Layer w10: P4.13 3040,1740 v1(3245,1740)
PB4: P4.12 R22.1 U3.18 | length 1202.6
  Top Layer w10: U3.18 2440,1525 2500,1465 P4.12 2775,1465 2830,1410 R22.1@3125,1410
PB5: P4.11 R27.2 U3.19 | length 1493.6
  Top Layer w10: U3.19 2450,1625 2510,1565 P4.11 2765,1565 2885,1685 3331.06,1685 3369.25,1646.81 R27.2
PC0: P4.9 U3.23 | length 813.7
  Top Layer w10: U3.23 2240,2025 2500,1765 P4.9@2676.01,1765
PC1: P4.8 U3.24 | length 813.7
  Top Layer w10: U3.24 2255,2125 2515,1865 P4.8@2676.01,1865
PC2: P4.7 U3.25 | length 813.7
  Top Layer w10: U3.25 2270,2225 2530,1965 P4.7@2676.01,1965
PC3: P4.6 U3.26 | length 813.7
  Top Layer w10: U3.26 2280,2325 2540,2065 P4.6@2676.01,2065
PC4: P4.5 R14.1 U3.27 | length 2293.4
  Top Layer w10: v1(1890,1885) 1890,2405 1910,2425 U3.27 2285,2425 2545,2165 P4.5@2676.01,2165 ; R14.1@1915,1023.91 v1(1915,1055)
  Bottom Layer w10: v1(1890,1885) 1890,1080 v1(1915,1055)
PC5: P4.4 R13.1 U3.28 | length 2419.1
  Top Layer w10: R13.1@1810,1023.91 v1(1810,1055) ; v1(1835,1885) 1835,2455 1905,2525 U3.28 2300,2525 2560,2265 P4.4@2676.01,2265
  Bottom Layer w10: v1(1810,1055) 1835,1080 v1(1835,1885)
PD0: P5.5 R10.2 R11.2 R30.1 U3.2 | length 1945.1
  Top Layer w10: R30.1 461.5,2167.91 1062.09,2167.91 P5.5 1205,2165 1465,2425 U3.2 ; R11.2 v1(1754.56,2885) R10.2@1801.25,2885
  Bottom Layer w10: U3.2 1730,2425 1754.56,2449.56 v1(1754.56,2885)
PD1: P5.6 R9.2 R12.2 R31.1 U3.3 | length 2016
  Top Layer w10: R31.1@459.81,2006.89 746.89,2006.89 805,2065 P5.6 1215,2065 1475,2325 U3.3 1730,2325 1755.75,2350.75 1755.75,2835 ; R9.2@1709.06,2835 1755.75,2835 ; R12.2 1755.75,2835
PD2: C11.2 P5.7 R15.2 S2.1 S2.2 U3.4 | length 2380.3
  Top Layer w10: S2.2 312.09,3030 539.17,3030 C11.2 746.09,3029.22 746.09,2940 746.09,2518.91 v1(940,2325) ; P5.7 1225,1965 1485,2225 U3.4
  Bottom Layer w10: v1(940,2325) 940,2030 1005,1965 P5.7
PD3: P5.8 R16.1 U3.5 | length 1311.4
  Top Layer w10: R16.1@467.86,1861.31 P5.8@1061.31,1861.31 ; P5.8 1205,1865 1465,2125 U3.5
  Top Layer w16: P5.8@1061.31,1861.31 P5.8
PD4: P5.9 R26.2 U3.6 | length 2683.1
  Top Layer w10: R26.2@562.15,260 530,260 495,295 495,435 930,870 v1(980,870) ; P5.9 1315,1765 1575,2025 U3.6
  Bottom Layer w10: v1(980,870) 1065,870 1190,995 1190,1640 P5.9
PD5: P5.10 R25.2 U3.11 | length 2383.4
  Top Layer w10: R25.2@380.57,260 435,260 470,295 470,445.36 920,895.36 v1(920,935) ; P5.10 1230,1665 1370,1525 U3.11
  Bottom Layer w10: v1(920,935) 920,1520 P5.10
PD6: P5.11 SW1.11 U3.12 | length 1531.5
  Top Layer w8: SW1.11 485,1605 460,1630 460,1710 500,1750 780,1750 965,1565 P5.11
  Top Layer w10: P5.11 1210,1565 1350,1425 U3.12
PD7: P5.12 SW1.12 U3.13 | length 1266.7
  Top Layer w8: SW1.12 705,1655 895,1465 P5.12
  Top Layer w10: P5.12 1210,1465 1345,1330 1665,1330 U3.13
RESET: C7.2 ICSP.5 P5.4 R8.1 S1.1 S1.2 U3.1 | length 6243.2
  Top Layer w10: R8.1@726.09,3346.19 726.09,3419.22 C7.2 540.75,3419.68 S1.1 S1.2 211.26,3421.26 135,3345 135,2785 655,2265 P5.4 1210,2265 1470,2525 U3.1 ; R8.1@726.46,3345.83 R8.1
  Top Layer w12: v1@2790,2525 3171.11,2143.89 v1(3171.11,1955)
  Bottom Layer w12: U3.1 1570,2525 1535,2490 1535,2410 1575,2370 1775,2370 1880,2475 2085,2475 2123.63,2513.63 2778.7,2513.63 2788.9,2523.83 v1(2789.57,2523.83) ; v1(3171.11,1955) 3285,1955 ICSP.5
RESET_EN: S1.3 S1.4 SW1.8 | length 2791.8
  Top Layer w8: S1.4 138.74,3578.74 80,3520 80,2655 200,2535 200,1860 310,1750 310,1595 450,1455 SW1.8
  Top Layer w10: S1.4 S1.3
RX: R9.1 R11.1 RX.1 U1.5 | length 536.2
  Top Layer w10: R9.1@1671.25,2836.19 1671.25,2985 ; RX.1 1671.25,2985 ; U1.5 1692.05,3272.05 1671.25,3251.25 1671.25,2985
SCK: ICSP.3 R27.1 U5.6 | length 660.4
  Top Layer w10: 3375,1602.28 U5.6 3375,1444.57 3524.57,1295 3745,1295 ICSP.3
SCL: J2.3 J6.3 R7.1 R13.2 SCL.1 U2.6 U4.6 | length 2358.6
  Top Layer w12: U2.6 1610,337.03 1617.03,330 v1(1990,330) J6.3 J2.3 ; SCL.1 R7.1@1806.44,950 ; R7.1@1810,955 R13.2 ; R7.1 1811.28,823.72 1990,645 v1(1990,420)
  Bottom Layer w12: v1(1990,330) v1(1990,420)
SDA: J2.4 J6.4 R6.1 R14.2 SDA.1 U2.5 U4.5 | length 2247.8
  Top Layer w12: U2.5 1660,377.03 1667.03,370 2040,370 ; R6.1 1913.72,831.28 2040,705 U4.5 2040,370 ; R6.1@1914.91,952.19 1915,952.28 R14.2 ; R6.1@1915.91,951.19 1917.09,950 SDA.1 ; J2.4 J6.4 2410,430 2350,370 2040,370
SI: ICSP.4 R28.1 U5.5 | length 486.2
  Top Layer w10: R28.1@3442,1610.19 3438.06,1610.19 3425,1597.13 U5.5 3425,1444.57 3524.57,1345 ICSP.4
SO: ICSP.1 R22.2 U5.2 | length 871.7
  Top Layer w10: R22.2 3230,1410 3325,1315 U5.2 3325,1170 3360,1135 3685,1135 ICSP.1
TX: R10.1 R12.1 TX.1 U1.1 | length 459.4
  Top Layer w10: U1.1 1800,3169.68 1839.06,3130.62 1839.06,2983.41 ; TX.1 1837.47,2985 1839.06,2983.41 ; R12.1@1839.06,2836.19 1839.06,2983.41
VBus: C3.2 F1.1 J1.1 P10.1 R2.2 R3.2 R4.1 R100.1 | length 1663.7
  Top Layer w12: R2.2@1083.87,3245 1083.87,3386.16 R100.1@1087.81,3390.09 ; R100.1@1092.19,3390.09 1149.91,3390.09 v1(1150,3390) ; v1(1630,3378.11) 1630,3507.28 1661,3538.28 1661,3580 1661,3606 1675,3620
  Top Layer w16: 1660.55,3634.45 J1.1 ; 1861.83,3536.22 1861.83,3701.83 1938.47,3778.47 1938.47,3783.47 P10.1 ; F1.1@1906.09,3535 1908.09,3535 C3.2@1908.09,3475.9 ; C3.2@1908.89,3475.9 1909.84,3474.94 C3.2
  Top Layer w20: 1660.55,3634.45 1675,3620 1735,3620 1818.78,3536.22 1861.83,3536.22 1904.87,3536.22 F1.1@1906.09,3535
  Bottom Layer w12: v1(1150,3390) 1161.89,3378.11 v1(1630,3378.11)
VCC: C2.2 C5.1 C6.2 C8.1 C10.1 C14.2 D1.2 ICSP.2 J2.1 J6.1 J7.1 P3.1 P4.1 P5.1 P5.14 P6.1 R6.2 R7.2 R8.2 R24.2 S2.3 S2.4 SW1.6 U1.4 U2.1 U2.8 U3.7 U3.20 U4.8 U5.8 VCC.1 VCC_2.1 | length 18720.5
  Top Layer w10: U2.1 U2.8 ; U3.7 1695,1925 1887.87,1732.13 1962.87,1732.13 U3.20 2045,1725 2100,1670 C8.1@2130,1670 ; U1.4 1735.49,3245.96 2039.51,3245.96 C14.2 2090.47,3245.47 2100,3255 2100,3409.37 C2.2 ; C8.1 C6.2
  Top Layer w12: S2.4 S2.3 703.74,3188.74 760,3245 775,3245 ; R8.2@764.91,3342.81 775,3332.72 775,3245 ; v1(810,3245) 775,3245 ; U2.8 1510,505 ; C5.1 1510,505 ; R7.2@1851.93,950.39 1873.52,950.39 1876.09,947.81 1875.22,946.93 1875.22,915.87 1865,905.66 v1(1865,905) ; U4.8 1890,505 ; C10.1@1890,565.47 1890,505 ; J6.1 J2.1 ; 1510,505 v1(1830,505) 1890,505
  Top Layer w16: v1(240,1305) SW1.6 ; v1(715,1405) 885,1235 980,1235 ; P5.14 1010,1265 980,1235 ; v1(1283.09,1020) 1150,1020 1110,980 1040,980 980,1040 980,1235 ; U5.8 3275,1415 3320,1370 3385,1370 3510,1245 ICSP.2 ; v1(3685,1995) VCC.1 3760,2060 VCC_2.1
  Top Layer w18: P4.1 2775,2675 2920.22,2675 ; R24.2@3015,2805.18 3015,2769.78 2920.22,2675 ; v1(3375,1995) 3375,2220.22 2920.22,2675
  Top Layer w20: C2.2@2100,3411.97 2100,3472.5 ; D1.2@2100,3533.03 2100,3472.5 ; 2365,3410 2245,3410 2182.5,3472.5 2100,3472.5
  Top Layer w24: P5.1 v1(1065,3120) ; P6.1 2365,3715 2365,3410 2470,3410 2630,3250
  Bottom Layer w12: J7.1 P3.1 895,160 925,130 1837.03,130 ; v1(1865,905) 1830,870 v1(1830,505) 1830,137.03 1837.03,130 ; J6.1 1837.03,130
  Bottom Layer w16: v1(240,1305) 340,1405 v1(715,1405) ; v1(1283.09,1020) 1750,1020 v1(1865,905) 2035,905 2110,980 2110,1670 2055,1725 U3.20 ; v1(3685,1995) 3685,1670 3855,1500 3855,1205 3820,1170 3715,1170 3695,1190 ICSP.2
  Bottom Layer w18: v1(3375,1995) v1(3685,1995)
  Bottom Layer w24: v1(810,3245) 906,3149 1071,3149 1082.5,3137.5 ; P5.1 1275,2565 1420,2420 1420,2085 1580,1925 U3.7 ; v1(1065,3120) 1082.5,3137.5 ; P4.1 2615,2615 2615,3235 2625,3245 1190,3245 1082.5,3137.5
  other v1: 1125,3120 1065,3175 2600,3220 2655,3220 2655,3280
WP: SW1.7 U2.7 U4.7 U5.3 | length 3941.8
  Top Layer w12: SW1.7 550,1405 v1(1435,520) ; v1(1560,420) 1560,302.03 1567.03,295 v1(1940,295) 2275,295 v1(2300,270) ; v1(3373.5,1183.69) 3374.25,1184.44 3374.25,1247.95 U5.3
  Bottom Layer w12: v1(1435,520) 1435.77,519.23 1460.77,519.23 v1(1560,420) ; v1(1940,295) v1(1940,420) ; v1(2300,270) 2410.5,380.5 2503.91,380.5 3307.1,1183.69 v1(3373.5,1183.69)
X1: U3.9 X1.1 | length 320.3
  Top Layer w10: X1.1@1460,1773.43 1508.43,1725 U3.9
  Bottom Layer w20: X1.1@1460,1773.43 1460.3,1773.73 1549.7,1773.73 X1.1@1550,1774.03
X2: U3.10 X1.3 X2.1 | length 320.7
  Top Layer w10: X1.3 1508.43,1625 U3.10
  Bottom Layer w20: X1.3 1460.79,1575.79 1549.21,1575.79 X2.1
pads on no net: J1.M1 J7.3 U1.2 U1.3 U1.6 U1.8 U1.9 U1.10 U1.11 U1.12 U1.13 U1.14 U1.24 U1.27 U1.28

## Polygon pours and split planes (outlines as drawn)
LINE_IN on Top Layer "L1GND" (solid, remove dead copper, pour order 1): 1560,3050 1610,2995 1640,2995 1650,3005 1650,3090 1640,3100 1615,3100
LINE_IN on Top Layer "L1GND" (solid, remove dead copper, pour order 0): 1955,3055 1905,3110 1875,3110 1865,3100 1865,3015 1875,3005 1900,3005

## Other copper
Top Layer:
  region net VCC: 1050,3190 1050,3105 1140,3105 1140,3190
  rectangle net VCC: 2585,3205 2670,3295
  rectangle net GND: 1550,3658.1 1590,3725
  text "Dakota Abernathy" at 3235,795 h60
  text "Prac V1.0" at 3235,620 h60
Bottom Layer:
  region net VCC: 1050,3190 1050,3105 1140,3105 1140,3190
  rectangle net VCC: 2585,3205 2670,3295
  rectangle net GND: 1550,3660 1590,3725
  rectangle net LINE_IN: 1590,2995 1930,3105
  text "This is my world now" at 3645,2420 h60

## Silkscreen, mask and mechanical layers (free items; w line width, h text height)
Top Overlay:
  lines w8: 2040,3520 2040,3555
  text "+" at 1825,3780 h60
  text "+" at 2415,3680 h60
  text "+" at 3705,3680 h60
  text "RESET" at 430,3665 h60
  text "VBus" at 1895,3665 h60
  text "VCC" at 2410,3590 h60
  text "Pin 2" at 245,2875 h60
  text "#=IDE" at 165,2730 h60
  text "*=PWM" at 165,2627.5 h60
  text "+=ADC" at 165,2525 h60
  text "VCC" at 809.93,2525 h60
  text "VCC" at 1140,2525 h60
  text "VCC" at 2414.92,2525 h60
  text "VCC" at 2735,2525 h60
  text "GND" at 1140,2425.33 h60
  text "GND" at 809.93,2424.67 h60
  text "GND" at 2414.92,2425 h60
  text "GND" at 2735,2425 h60
  text "LINE_IN" at 1140,2325.67 h60
  text "LINE_IN" at 590,2324.33 h60
  text "LINE_IN" at 2194.99,2325 h60
  text "LINE_IN" at 2735,2325 h60
  text "RESET" at 1140,2226 h60
  text "19:SCL+" at 2194.99,2225 h60
  text "19:SCL+" at 2735,2225 h60
  text "RESET" at 689.97,2224 h60
  text "0:RDX" at 1140,2126.33 h60
  text "18:SDA+" at 2194.99,2125 h60
  text "18:SDA+" at 2735,2125 h60
  text "0:RDX" at 699.96,2123.67 h60
  text "1:TDX" at 1140,2026.67 h60
  text "17:+" at 2374.93,2025 h60
  text "17:+" at 2735,2025 h60
  text "1:TDX" at 709.96,2023.33 h60
  text "2:INT0" at 1140,1927 h60
  text "16:+" at 2374.93,1925 h60
  text "16:+" at 2735,1925 h60
  text "2:INT0" at 649.98,1923 h60
  text "3:INT1*" at 1140,1827.33 h60
  text "15:+" at 2374.93,1825 h60
  text "15:+" at 2735,1825 h60
  text "3:INT1*" at 600,1822.67 h60
  text "4:XCK" at 1140,1727.67 h60
  text "14:+" at 2374.93,1725 h60
  text "14:+" at 2735,1725 h60
  text "4:XCK" at 699.96,1722.33 h60
  text "5:T1*" at 1140,1628 h60
  text "REF" at 2414.92,1625 h60
  text "REF" at 2735,1625 h60
  text "5:T1*" at 699.96,1622 h60
  text "6:0*" at 1140,1528.33 h60
  text "13:SLC" at 2254.97,1525 h60
  text "13:SLC" at 2735,1525 h60
  text "6:AIN0*" at 590,1521.67 h60
  text "7:AIN1" at 1140,1428.67 h60
  text "12:MISO" at 2204.98,1425 h60
  text "12:MISO" at 2735,1425 h60
  text "7:AIN1" at 669.97,1421.33 h60
  text "8:CLK0" at 1140,1329 h60
  text "11:MOSI*" at 2155,1325 h60
  text "11:*" at 2735,1325 h60
  text "8:CLK0" at 639.98,1321 h60
  text "VCC" at 1140,1229.33 h60
  text "10:CS*" at 2254.97,1225 h60
  text "10:*" at 2735,1225 h60
  text "VCC" at 809.93,1220.67 h60
  text "Pin 7" at 250,1215 h60
  text "GND" at 1140,1129.67 h60
  text "9:*" at 2424.91,1125 h60
  text "9:*" at 2735,1125 h60
  text "Pin 6" at 250,1123 h60
  text "GND" at 809.93,1120.33 h60
  text "LED EN" at 250,1031 h60
  text "GND" at 1140,1030 h60
  text "GND" at 2414.92,1025 h60
  text "GND" at 2735,1025 h60
  text "GND" at 810,1020 h60
  text "ALT REF" at 250,939 h60
  text "RESET EN" at 250,847 h60
  text "WP" at 250,755 h60
  text "D.A. / 4/11/2021" at 3325,115 h60
Bottom Overlay:
  text "Dakota Abernathy / Prac V1.0" at 1235,2850 h60
Board Outline (Mech22):
  the board outline again, w8

## Text inside footprints (layer, text, board x,y; h text height)
D1: Mechanical 21 "K0.1" at 2081.97,3529.09 h3.94 r90
F1: Mechanical 21 "K0.1" at 1931.97,3529.09 h3.94 r90
ICSP: Top Overlay "6" at 3660,1550 h50 r270; Top Overlay "5" at 3765,1550 h50 r270; Top Overlay "2" at 3660,1170 h50 r270; Top Overlay "1" at 3770,1165 h50 r270
J1: Mechanical 12 "DRAFT" at 1766.85,3915.98 h9.84 r180
R2: Mechanical 21 "K0.1" at 1103.03,3250.91 h3.94 r270
R3: Mechanical 21 "K0.1" at 1103.03,3340.91 h3.94 r270
R4: Mechanical 21 "K0.1" at 1638.03,3585.91 h3.94 r270
R5: Mechanical 21 "K0.1" at 1306.97,3399.09 h3.94 r90
R6: Mechanical 21 "K0.1" at 1894.03,955.91 h3.94 r270
R7: Mechanical 21 "K0.1" at 1830.97,944.09 h3.94 r90
R8: Mechanical 21 "K0.1" at 746.97,3350.91 h3.94 r90
R9: Mechanical 21 "K0.1" at 1692.13,2829.09 h3.94 r90
R10: Mechanical 21 "K0.1" at 1818.19,2890.91 h3.94 r270
R11: Mechanical 21 "K0.1" at 1692.13,2879.09 h3.94 r90
R12: Mechanical 21 "K0.1" at 1818.19,2840.91 h3.94 r270
R13: Mechanical 21 "K0.1" at 1804.09,1003.03 h3.94
R14: Mechanical 21 "K0.1" at 1909.09,1003.03 h3.94
R15: Mechanical 21 "K0.1" at 763.03,2934.09 h3.94 r270
R16: Mechanical 21 "K0.1" at 443.94,1867.22 h3.94 r270
R17: Mechanical 21 "K0.1" at 86.97,1654.09 h3.94 r90
R19: Mechanical 21 "K0.1" at 86.97,1599.09 h3.94 r90
R20: Mechanical 21 "K0.1" at 3151.97,1339.09 h3.94 r90
R21: Mechanical 21 "K0.1" at 86.97,1549.09 h3.94 r90
R22: Mechanical 21 "K0.1" at 3151.97,1404.09 h3.94 r90
R23: Mechanical 21 "K0.1" at 86.97,1499.09 h3.94 r90
R24: Mechanical 21 "K0.1" at 3009.09,2828.03 h3.94
R25: Mechanical 21 "K0.1" at 361.97,254.09 h3.94 r90
R26: Mechanical 21 "K0.1" at 583.03,265.91 h3.94 r270
R27: Mechanical 21 "K0.1" at 3379.09,1631.06 h3.94 r180
R28: Mechanical 21 "K0.1" at 3449.09,1631.06 h3.94 r180
R29: Mechanical 21 "K0.1" at 3297.28,1627.13 h3.94
R30: Mechanical 21 "K0.1" at 438.94,2176.72 h3.94 r270
R31: Mechanical 21 "K0.1" at 438.94,2010.91 h3.94 r270
R100: Mechanical 21 "K0.1" at 1095.91,3411.97 h3.94 r180
S1: Mechanical 12 "DRAFT" at 539.17,3645.67 h9.84 r180
S2: Mechanical 12 "DRAFT" at 539.17,3255.67 h9.84 r180
U1: Mechanical 12 "DRAFT" at 1690.24,3061.02 h60 r180
U3: Mechanical 12 "DRAFT" at 1735,2620 h35
X1: Mechanical 12 "DRAFT" at 1590,1740 h36 r270